# Altium PCB PCB_micromouseV4_2025-09-20.pcbdoc
Units mm, origin at the board's own origin, x right, y up, seen from the top; angles counter-clockwise.
Board outline 102.76 x 99.65 mm, 2 copper layers (Top Layer, Bottom Layer); 56 components, 43 nets, 243 pads, 0 vias.
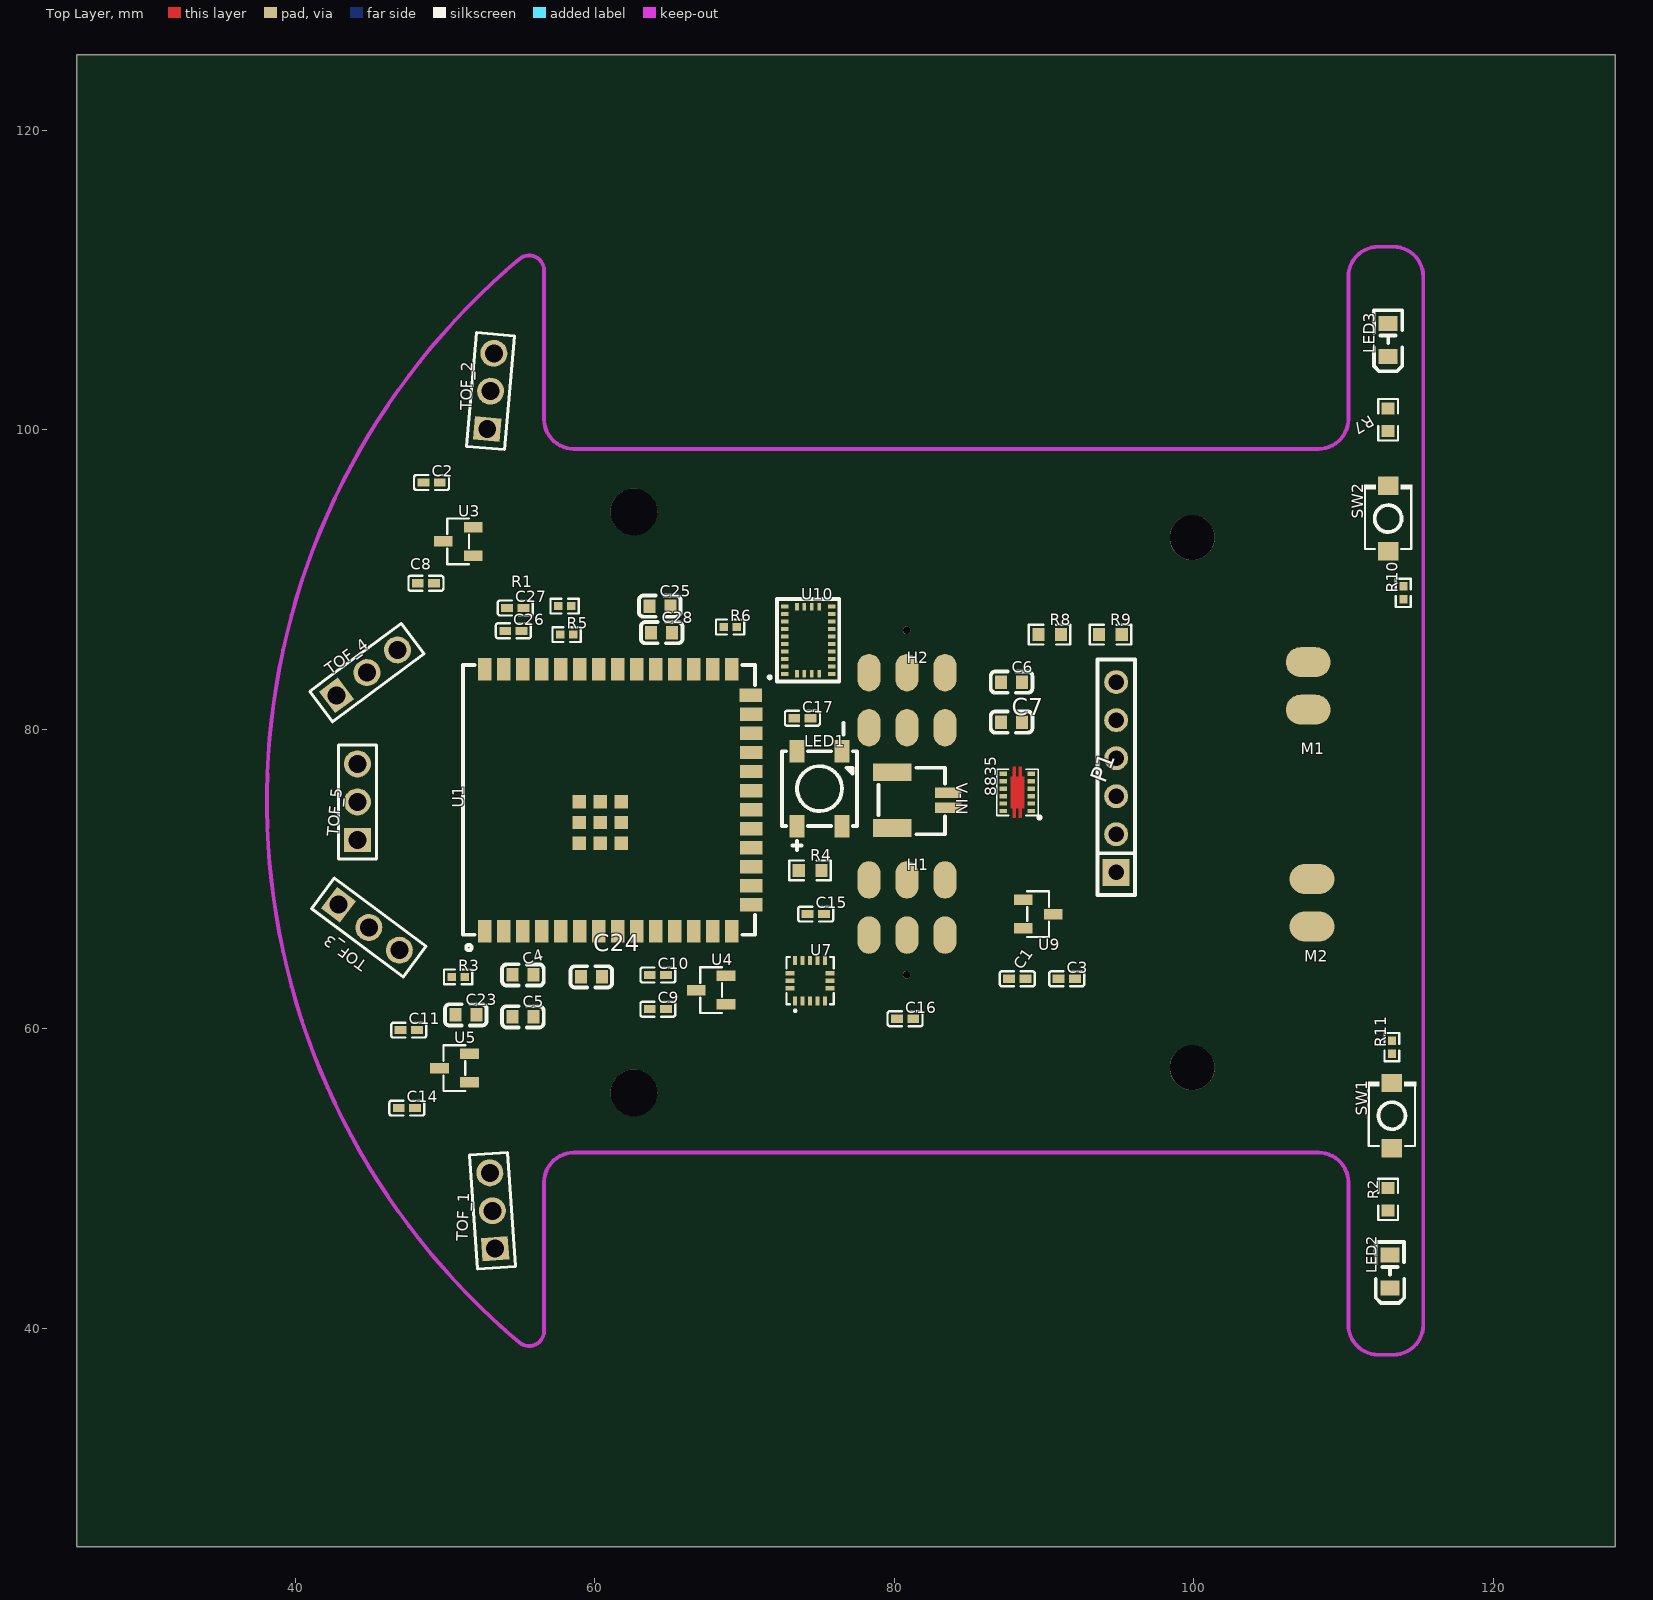
[diagram p0: Top Layer view]
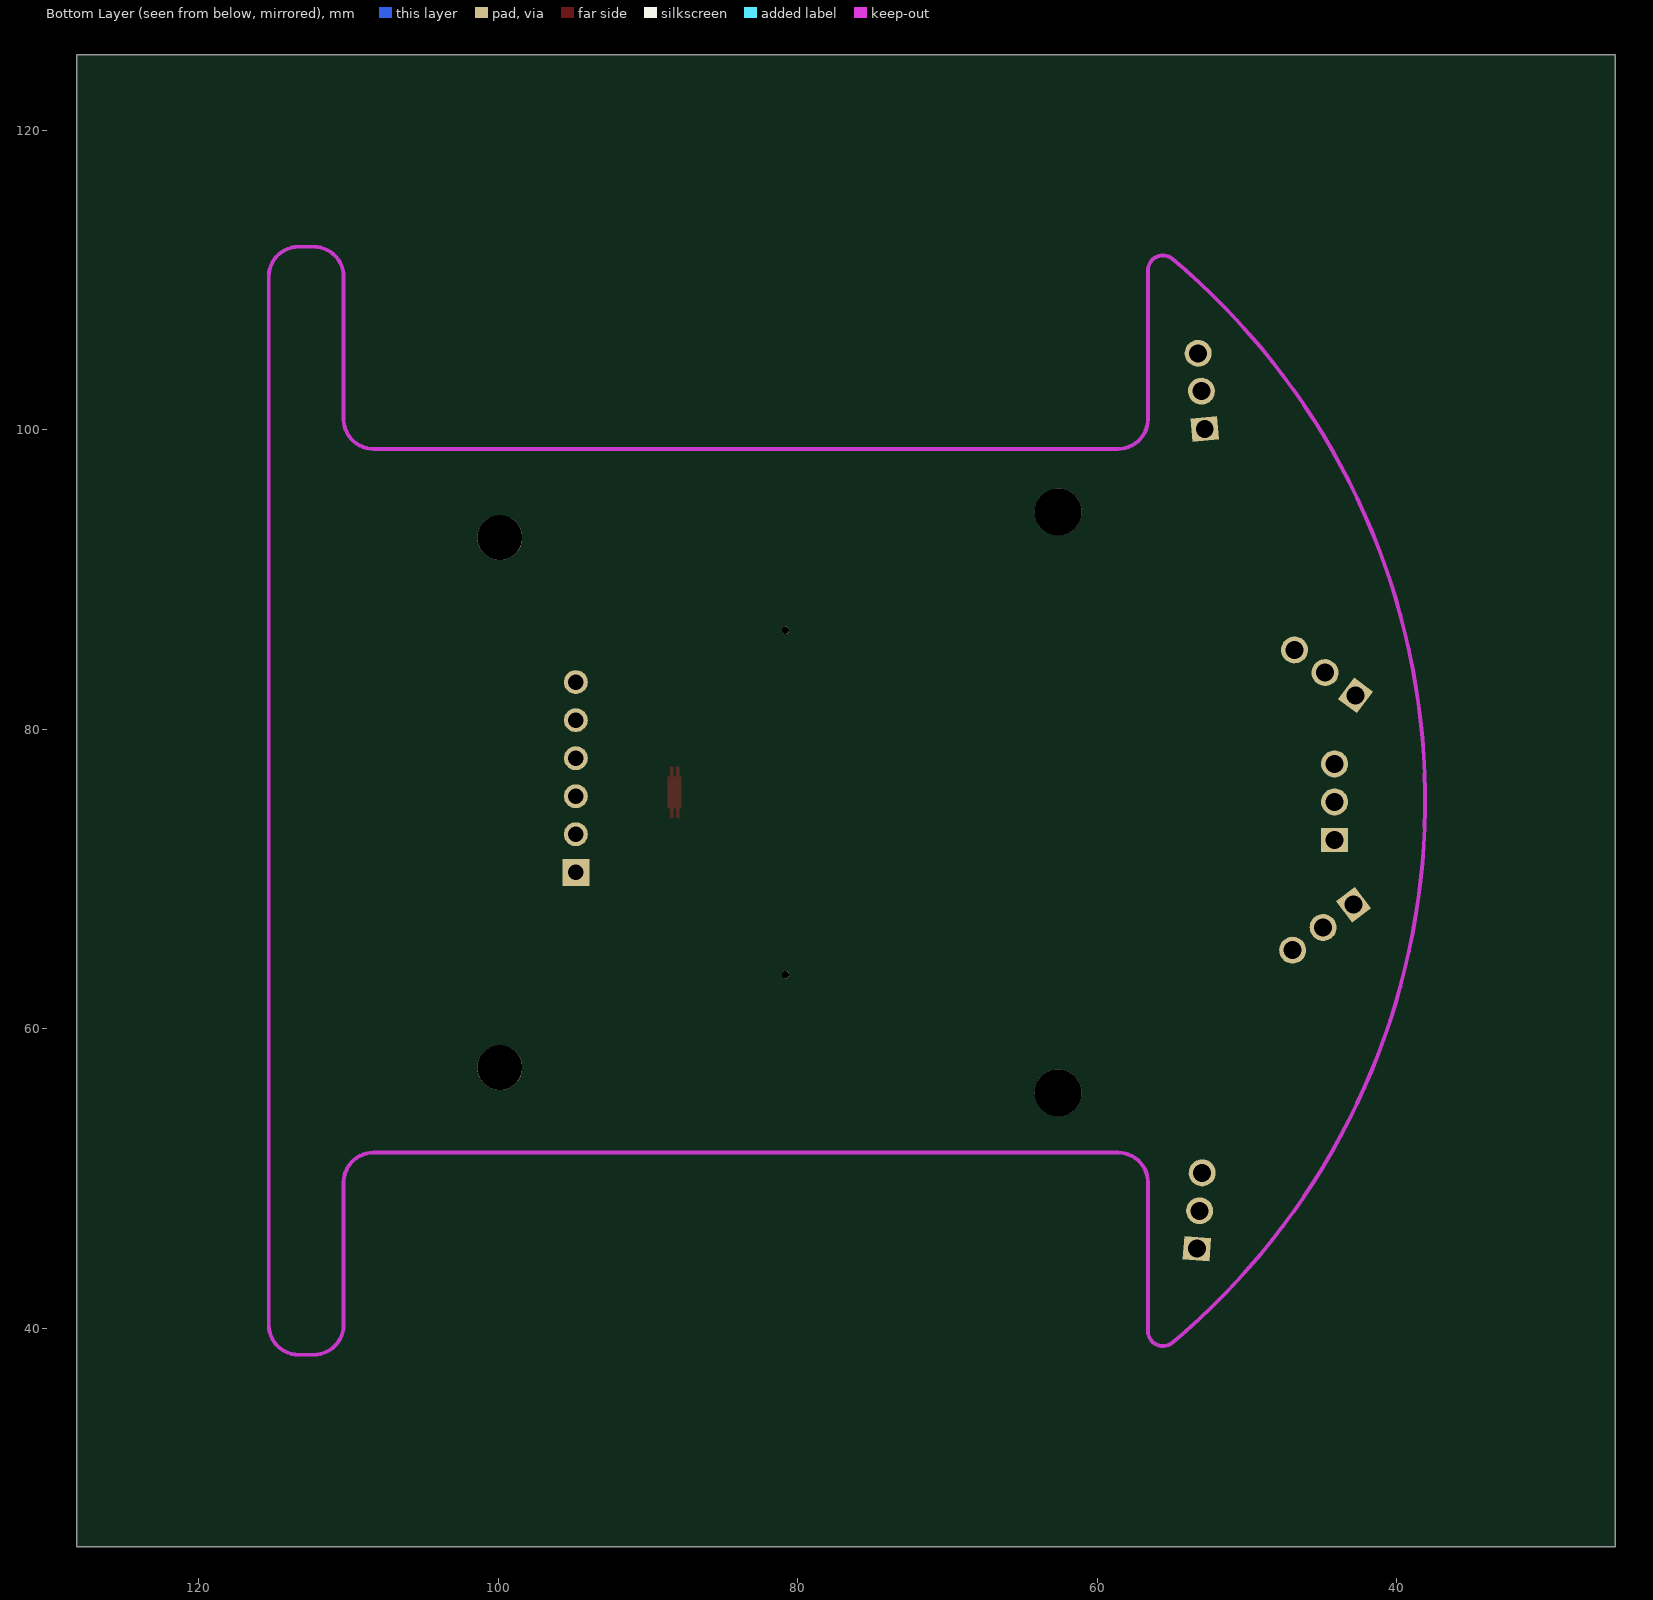
[diagram p1: Bottom Layer view, seen from below]

## Layer stack, top to bottom
Top Layer: signal copper (thickness not stored)
Dielectric: dielectric 0.32, FR-4, Dk 4.8
Bottom Layer: signal copper (thickness not stored)

## Board outline
128.161,25.4 25.4,25.4 25.4,125.054 128.161,125.054

## Components (designator, comment, footprint, x,y, rotation, side; value= is the part's Value field where it differs from the comment)
8835 "DRV8835DSSR" WSON-12_L3.0-W2.0-P0.50-BL-EP 88.22,75.782 r90 top
C1 "1uF" C0402 88.22,63.336 r0 top
C2 "1uF" C0402 49.104,96.483 r0 top
C3 "1uF" C0402 91.522,63.336 r0 top
C4 "100nF" C0603 55.2,63.59 r0 top
C5 "10uF" C0603 55.2,60.796 r0 top
C6 "100nF" C0603 87.839,83.148 r0 top
C7 "100nF" C0603 87.839,80.481 r0 top
C8 "1uF" C0402 48.723,89.752 r0 top
C9 "1uF" C0402 64.217,61.304 r0 top
C10 "1uF" C0402 64.217,63.59 r0 top
C11 "1uF" C0402 47.58,59.907 r0 top
C14 "1uF" C0402 47.453,54.7 r0 top
C15 "100nF" C0402 74.758,67.654 r0 top
C16 "100nF" C0402 80.727,60.669 r0 top
C17 "100nF" C0402 73.869,80.735 r0 top
C23 "100nF" C0603 51.39,60.923 r0 top
C24 "22uF" C0603 59.772,63.463 r0 top
C25 "22nF" C0603 64.344,88.228 r0 top
C26 "100nF" C0402 54.565,86.577 r0 top
C27 "100nF" C0402 54.692,88.101 r0 top
C28 "6.8nF" C0603 64.471,86.45 r0 top
H1 "Header-Male-2.54_1x6" ENCX6 78.314,69.94 r0 top
H2 "Header-Male-2.54_1x6" ENCX6 78.314,83.783 r0 top
LED1 "XL-5050RGBC-WS2812B" LED-SMD_4P-L5.0-W5.0-BL_XL-5050RGBC 75.012,76.036 r0 top
LED2 "XL-2012SURC" LED0805-RD_RED 113.112,43.778 r90 top
LED3 "XL-2012SURC" LED0805-RD_RED 112.985,106.008 r90 top
M1 "M1" M_PADS 107.651,82.894 r180 top
M2 "Header-Male-2.54_1x2" M_PADS 107.905,68.416 r180 top
P1 "Code_Uplaoder" HDR-TH_6P-P2.54-V-F 94.824,76.798 r90 top
R1 "10kΩ" R0402 57.994,88.228 r0 top
R2 "330Ω" R0603 112.985,48.604 r90 top
R3 "10kΩ" R0402 50.882,63.463 r0 top
R4 "330Ω" R0603 74.377,70.575 r0 top
R5 "10kΩ" R0402 58.121,86.323 r0 top
R6 "10kΩ" R0402 69.043,86.831 r0 top
R7 "330Ω" R0603 112.985,100.674 r90 top
R8 "47kΩ" R0603 90.379,86.323 r0 top
R9 "47kΩ" R0603 94.443,86.323 r0 top
R10 "10kΩ" R0402 114.001,89.117 r90 top
R11 "10kΩ" R0402 113.239,58.764 r90 top
SW1 "TS-1088-AR02016" SW-SMD_L3.9-W3.0-P4.45 113.239,54.192 r90 top
SW2 "TS-1088-AR02016" SW-SMD_L3.9-W3.0-P4.45 112.985,94.07 r90 top
TOF_1 "Header-Male-2.54_1x3" HDR-TH_3P-P2.54-V-M-1#1 53.168,47.842 r94 top
TOF_2 "Header-Male-2.54_1x3" HDR-TH_3P-P2.54-V-M-1#1 53.041,102.579 r85 top
TOF_3 "Header-Male-2.54_1x3" HDR-TH_3P-P2.54-V-M-1#1 44.913,66.765 r323.29 top
TOF_4 "Header-Male-2.54_1x3" HDR-TH_3P-P2.54-V-M-1#2 44.786,83.783 r36.71 top
TOF_5 "Header-Male-2.54_1x3" HDR-TH_3P-P2.54-V-M-1#1 44.151,75.147 r90 top
U1 "ESP32-S3-WROOM-1U-N16R2" WIRELM-SMD_ESP32-S3-WROOM-1U 61.55,75.274 r90 top
U3 "AP7333-33SRG-7" SOT-23-3_L2.9-W1.3-P1.90-LS2.4-BR 50.882,92.546 r0 top
U4 "AP7333-33SRG-7" SOT-23-3_L2.9-W1.3-P1.90-LS2.4-BR 67.773,62.574 r0 top
U5 "AP7333-33SRG-7" SOT-23-3_L2.9-W1.3-P1.90-LS2.4-BR 50.628,57.367 r0 top
U7 "ICM-20602" LGA-16_L3.0-W3.0-P0.50-BL 74.377,63.209 r0 top
U9 "AP7333-33SRG-7" SOT-23-3_L2.9-W1.3-P1.90-LS2.4-BR 89.617,67.654 r180 top
U10 "BNO055" LGA-28_L5.2-W3.8-P0.50-BL 74.25,85.942 r0 top
V-IN "1.0-2PWT" CONN-SMD_HC-1.0-2PWT 81.743,75.274 r270 top

## Footprints (in the part's own frame and the unit in brackets; to place one, negate y for a bottom-side part, rotate by r counter-clockwise, add the part's x,y. Pads: shape width x height; smd on the part's side, far side on the other; paste and mask are expansions set on the pad)
C0402 [mm]
  rect 0.79x0.54 smd paste-100 mask+0.051: 1(-0.545,0) 2(0.545,0)
  silkscreen extent -1.17,-0.5 1.17,0.5
C0603 [mm]
  rect 0.8x0.9 smd paste+0 mask+0.051: 1(-0.7,0) 2(0.7,0)
  silkscreen extent -1.39,-0.71 1.39,0.71
CONN-SMD_HC-1.0-2PWT [mm]
  rect 0.7x1.75 smd paste+0 mask+0.051: 1(0.5,1.87) 2(-0.5,1.87)
  rect 1.2x2.55 smd paste+0 mask+0.051: 3(-1.855,-1.87) 4(1.855,-1.87)
  silkscreen extent -2.16,-2.79 2.29,1.65
ENCX6 [mil]
  oval 60x98.42 smd paste+0 mask+2: 1(0,0) 2(100,0) 3(200,0) 4(0,-145) 5(100,-145) 6(200,-145)
HDR-TH_3P-P2.54-V-M-1#1 [mm]
  rect 1.575x1.8 hole 1.2 paste+0 mask+0.051: 1(-2.54,0)
  round 1.8 hole 1.2 paste+0 mask+0.051: 2(0,0) 3(2.54,0)
  silkscreen extent -3.81,-1.27 3.81,1.27
HDR-TH_3P-P2.54-V-M-1#2 [mm]
  rect 1.575x1.8 hole 1.2 rot 179.99 paste+0 mask+0.051: 1(-2.54,0)
  round 1.8 hole 1.2 paste+0 mask+0.051: 2(0,0) 3(2.54,0)
  silkscreen extent -3.81,-1.27 3.81,1.27
HDR-TH_6P-P2.54-V-F [mm]
  rect 1.8x1.8 hole 1.02 paste+0 mask+0.051: 1(-6.35,0)
  round 1.6 hole 1.02 paste+0 mask+0.051: 2(-3.81,0) 3(-1.27,0) 4(1.27,0) 5(3.81,0) 6(6.35,0)
  silkscreen extent -7.87,-1.25 7.87,1.25
LED0805-RD_RED [mm]
  rect 1x1.25 smd paste+0 mask+0.051: 1(-1.1,0) 2(1.1,0)
  silkscreen extent -2.1,-0.95 1.98,0.96
LED-SMD_4P-L5.0-W5.0-BL_XL-5050RGBC [mm]
  rect 1x1.5 smd paste+0 mask+0.051: 1(-1.5,-2.5) 2(1.5,-2.5) 3(1.5,2.5) 4(-1.5,2.5)
  silkscreen extent -2.5,-4.1 2.5,4.4
LGA-16_L3.0-W3.0-P0.50-BL [mm]
  rect 0.28x0.6 smd paste+0 mask+0.051: 1(-1,-1.342) 2(-0.5,-1.342) 3(0,-1.342) 4(0.5,-1.342) 5(1,-1.342) 9(1,1.342) 10(0.5,1.342) 11(0,1.342) 12(-0.5,1.342) 13(-1,1.342)
  rect 0.6x0.28 smd paste+0 mask+0.051: 6(1.342,-0.5) 7(1.342,0) 8(1.342,0.5) 14(-1.342,0.5) 15(-1.342,0) 16(-1.342,-0.5)
  silkscreen extent -1.58,-2.08 1.58,1.58
LGA-28_L5.2-W3.8-P0.50-BL [mm]
  rect 0.5x0.25 smd paste+0 mask+0.051: 1(-1.563,-2.25) 6(1.563,-2.25) 7(1.563,-1.75) 8(1.563,-1.25) 9(1.563,-0.75) 10(1.563,-0.25) 11(1.563,0.25) 12(1.563,0.75) 13(1.563,1.25) 14(1.563,1.75) 15(1.563,2.25) 20(-1.563,2.25) 21(-1.563,1.75) 22(-1.563,1.25) 23(-1.563,0.75) 24(-1.563,0.25) 25(-1.563,-0.25) 26(-1.563,-0.75) 27(-1.563,-1.25) 28(-1.563,-1.75)
  rect 0.25x0.5 smd paste+0 mask+0.051: 2(-0.75,-2.25) 3(-0.25,-2.25) 4(0.25,-2.25) 5(0.75,-2.25) 16(0.75,2.25) 17(0.25,2.25) 18(-0.25,2.25) 19(-0.75,2.25)
  silkscreen extent -2.66,-2.75 2.08,2.75
M_PADS [mm]
  oval 3x2 smd paste+0 mask+0.051: 1(0,1.587) 2(0,-1.587)
R0402 [mm]
  rect 0.566x0.54 smd paste-100 mask+0.051: 1(-0.433,0) 2(0.433,0)
  silkscreen extent -0.94,-0.5 0.94,0.5
R0603 [mm]
  rect 0.806x0.864 smd paste-100 mask+0.051: 1(-0.753,0) 2(0.753,0)
  silkscreen extent -1.39,-0.66 1.39,0.66
SOT-23-3_L2.9-W1.3-P1.90-LS2.4-BR [mm]
  rect 1.25x0.7 smd paste+0 mask+0.051: 1(1,-0.95) 2(1,0.95) 3(-1,0)
  silkscreen extent -0.73,-1.53 0.73,1.53
SW-SMD_L3.9-W3.0-P4.45 [mm]
  rect 1.23x1.36 smd paste+0 mask+0.051: 1(-2.185,0) 2(2.185,0)
  silkscreen extent -2.03,-1.62 2.25,1.62
WIRELM-SMD_ESP32-S3-WROOM-1U [mm]
  rect 1.5x0.9 smd paste+0 mask+0.05: 1(-8.75,8.895) 2(-8.75,7.625) 3(-8.75,6.355) 4(-8.75,5.085) 5(-8.75,3.815) 6(-8.75,2.545) 7(-8.75,1.275) 8(-8.75,0.005) 9(-8.75,-1.265) 10(-8.75,-2.535) 11(-8.75,-3.805) 12(-8.75,-5.075) 13(-8.75,-6.345) 14(-8.75,-7.615) 27(8.75,-7.615) 28(8.75,-6.345) 29(8.75,-5.075) 30(8.75,-3.805) 31(8.75,-2.535) 32(8.75,-1.265) 33(8.75,0.005) 34(8.75,1.275) 35(8.75,2.545) 36(8.75,3.815) 37(8.75,5.085) 38(8.75,6.355) 39(8.75,7.625) 40(8.75,8.895)
  rect 0.9x1.5 smd paste+0 mask+0.05: 15(-6.985,-8.895) 16(-5.715,-8.895) 17(-4.445,-8.895) 18(-3.175,-8.895) 19(-1.905,-8.895) 20(-0.635,-8.895) 21(0.635,-8.895) 22(1.905,-8.895) 23(3.175,-8.895) 24(4.445,-8.895) 25(5.715,-8.895) 26(6.985,-8.865)
  rect 0.9x0.9 smd paste+0 mask+0.051: 41(-2.9,-0.225) 41(-2.9,1.175) 41(-2.9,2.575) 41(-1.501,2.575) 41(-1.501,-0.225) 41(-1.501,1.175) 41(-0.1,2.575) 41(-0.1,1.175) 41(-0.1,-0.225)
  silkscreen extent -10.04,-9.14 9.02,10.36
WSON-12_L3.0-W2.0-P0.50-BL-EP [mil]
  rect 11x19.7 smd paste+0 mask+2: 1(-49.21,-37) 2(-29.53,-37) 3(-9.84,-37) 4(9.84,-37) 5(29.53,-37) 6(49.21,-37) 7(49.21,37) 8(29.53,37) 9(9.84,37) 10(-9.84,37) 11(-29.53,37) 12(-49.21,37)
  Top Layer region: -41.34,17.72 -41.34,11.81 -66.93,11.81 -66.93,3.94 -66.93,3.94 -41.34,3.94 -41.34,-3.94 -66.93,-3.94 -66.93,-11.81 -41.34,-11.81 -41.34,-17.72 41.34,-17.72 41.34,-11.81 66.93,-11.81 66.93,-3.94 41.34,-3.94 41.34,3.94 66.93,3.94 66.93,11.81 41.34,11.81 41.34,17.72
  silkscreen extent -69,-61 61,54

## Free pads (board coordinates)
  round 3.124 hole 3.124 unplated paste+0: ""(62.614,55.716) ""(62.614,94.516)
  round 3 hole 3 unplated paste+0: ""(62.614,55.7) ""(99.904,57.4) ""(99.904,92.8)
  round 0.5 hole 0.5 unplated paste+0: ""(80.824,63.6) ""(80.824,63.616) ""(80.824,86.6) ""(80.824,86.616)

## Nets (pads, with @x,y where several pads share a name; then routed paths per layer and width w, separated by ;. In a path a pad name is that pad's centre, name@x,y a point inside that pad or via, vN(x,y) a via of type N, cw(c..) or ccw(c..) an arc to the next point about the centre after c; other vN are vias at no path point)
3V3: 8835.12 C7.2
3V3_ENC: C1.2 H1.2 H2.2 U9.2
3V3_ESP: C4.2 C5.2 C8.2 C24.2 LED1.1 P1.6 R3.2 SW1.2 SW2.2 U1.2 U3.2
3V3_GYRO: C10.2 C16.2 C17.2 C25.2 C27.1 C28.2 R1.1 R5.2 R6.2 U4.2 U7.1 U7.16 U10.3 U10.28
3V3_TOF: C14.2 TOF_1.2 TOF_2.2 TOF_3.2 TOF_4.2 TOF_5.2 U5.2
BATTERY: 8835.1 C2.2 C3.2 C6.2 C9.2 C11.2 R9.2 U3.3 U4.3 U5.3 U9.3 V-IN.1
C15_2: C15.2 U7.14
C26_1: C26.1 U10.9
CS: H1.6 H2.6 U1.24
EN: C23.2 P1.2 R3.1 U1.3
GND: 8835.6 8835.11 C1.1 C2.1 C3.1 C4.1 C5.1 C6.1 C7.1 C8.1 C9.1 C10.1 C11.1 C14.1 C15.1 C16.1 C17.1 C23.1 C24.1 C25.1 C26.2 C27.2 C28.1 H1.1 H2.1 LED1.3 P1.5 R2.2 R7.2 R8.1 R10.1 R11.1 TOF_1.3 TOF_2.3 TOF_3.3 TOF_4.3 TOF_5.3 U1.1 U1.40 U1.41 U3.1 U4.1 U5.1 U7.8 U7.9 U7.10 U7.11 U7.12 U7.13 U7.15 U9.1 U10.2 U10.5 U10.6 U10.15 U10.16 U10.18 U10.25 V-IN.2
GPIO_0: P1.1 U1.27
LED: R4.1 U1.11 U1.25
LED1_4: LED1.4 R4.2
LED2_1: LED2.1 R7.1
LED3_1: LED3.1 R2.1
LED_L: LED2.2 U1.33
LED_R: LED3.2 U1.34
M1_1: 8835.2 M2.1
M1_2: 8835.3 M2.2
M1_PHASE: 8835.10 U1.21
M1_PWM: 8835.9 U1.22
M2_1: 8835.4 M1.1
M2_2: 8835.5 M1.2
M2_PHASE: 8835.8 U1.23
M2_PWM: 8835.7 U1.14
MISO_1: H1.4 U1.10
MISO_2: H2.4 U1.30
MOSI: H1.3 H2.3 U1.28
RX: P1.3 U1.36
S1: R10.2 SW2.1 U1.19
S2: R11.2 SW1.1 U1.20
SCL: R5.1 U1.17 U7.2 U10.19
SCLK: H1.5 H2.5 U1.29
SDA: R6.1 U1.12 U7.3 U10.20
TOF_1: TOF_1.1 U1.4
TOF_2: TOF_2.1 U1.5
TOF_3: TOF_3.1 U1.6
TOF_4: TOF_4.1 U1.7
TOF_5: TOF_5.1 U1.8
TX: P1.4 U1.37
U10_4: R1.2 U10.4
V_CHECK: R8.2 R9.1 U1.18
pads on no net: LED1.2 U1.9 U1.13 U1.15 U1.16 U1.26 U1.31 U1.32 U1.35 U1.38 U1.39 U7.4 U7.5 U7.6 U7.7 U10.1 U10.7 U10.8 U10.10 U10.11 U10.12 U10.13 U10.14 U10.17 U10.21 U10.22 U10.23 U10.24 U10.26 U10.27 V-IN.3 V-IN.4

## Polygon pours and split planes (outlines as drawn)
GND on Internal Plane 2 (split plane): 779 vertices, not listed, extent 38.1,38.227 115.334,112.227
GND on Internal Plane 2 (split plane): 95 vertices, not listed, extent 112.993,43.319 113.912,44.237
GND on Internal Plane 2 (split plane): 121 vertices, not listed, extent 52.241,44.308 54.45,46.308
GND on Internal Plane 2 (split plane): 144 vertices, not listed, extent 52.114,46.787 54.223,48.896
GND on Internal Plane 2 (split plane): 19 vertices, not listed, extent 52.071,49.393 52.609,49.895
GND on Internal Plane 2 (split plane): 20 vertices, not listed, extent 53.471,49.456 53.973,49.993
GND on Internal Plane 2 (split plane): 95 vertices, not listed, extent 111.93,49.847 112.849,50.765
GND on Internal Plane 2 (split plane): 20 vertices, not listed, extent 52.008,50.758 52.511,51.296
GND on Internal Plane 2 (split plane): 20 vertices, not listed, extent 53.373,50.856 53.911,51.358
GND on Internal Plane 2 (split plane): 183 vertices, not listed, extent 60.898,53.999 64.331,57.432
GND on Internal Plane 2 (split plane): 180 vertices, not listed, extent 98.25,55.746 101.559,59.054
GND on Internal Plane 2 (split plane): 95 vertices, not listed, extent 106.356,56.141 107.275,57.059
GND on Internal Plane 2 (split plane): 95 vertices, not listed, extent 48.614,57.872 49.533,58.791
GND on Internal Plane 2 (split plane): 95 vertices, not listed, extent 64.175,61.604 65.094,62.522
GND on Internal Plane 2 (split plane): 95 vertices, not listed, extent 73.839,62.576 74.758,63.495
GND on Internal Plane 2 (split plane): 95 vertices, not listed, extent 65.984,63.131 66.903,64.049
GND on Internal Plane 2 (split plane): 93 vertices, not listed, extent 80.42,63.195 81.229,64.02
GND on Internal Plane 2 (split plane): 20 vertices, not listed, extent 46.741,64.192 47.445,64.617
GND on Internal Plane 2 (split plane): 20 vertices, not listed, extent 45.895,64.751 46.32,65.456
GND on Internal Plane 2 (split plane): 95 vertices, not listed, extent 61.756,64.851 62.675,65.77
GND on Internal Plane 2 (split plane): 20 vertices, not listed, extent 47.579,65.038 48.004,65.743
GND on Internal Plane 2 (split plane): 144 vertices, not listed, extent 43.859,65.71 45.968,67.819
GND on Internal Plane 2 (split plane): 19 vertices, not listed, extent 46.454,65.877 47.159,66.301
GND on Internal Plane 2 (split plane): 95 vertices, not listed, extent 79.125,66.075 80.044,66.994
GND on Internal Plane 2 (split plane): 95 vertices, not listed, extent 76.38,66.075 77.299,66.994
GND on Internal Plane 2 (split plane): 95 vertices, not listed, extent 48.673,66.689 49.592,67.607
GND on Internal Plane 2 (split plane): 121 vertices, not listed, extent 41.556,66.939 44.198,69.627
GND on Internal Plane 2 (split plane): 95 vertices, not listed, extent 89.024,67.081 89.944,67.999
GND on Internal Plane 2 (split plane): 95 vertices, not listed, extent 55.426,67.301 56.345,68.22
GND on Internal Plane 2 (split plane): 95 vertices, not listed, extent 63.987,67.788 64.907,68.707
GND on Internal Plane 2 (split plane): 95 vertices, not listed, extent 82.105,67.794 83.024,68.713
GND on Internal Plane 2 (split plane): 121 vertices, not listed, extent 93.772,69.396 95.876,71.5
GND on Internal Plane 2 (split plane): 95 vertices, not listed, extent 67.092,69.404 68.011,70.323
GND on Internal Plane 2 (split plane): 95 vertices, not listed, extent 81.665,70.355 82.584,71.273
GND on Internal Plane 2 (split plane): 121 vertices, not listed, extent 43.099,71.667 45.203,73.546
GND on Internal Plane 2 (split plane): 137 vertices, not listed, extent 93.87,72.033 95.779,73.942
GND on Internal Plane 2 (split plane): 95 vertices, not listed, extent 87.879,72.954 88.798,73.872
GND on Internal Plane 2 (split plane): 95 vertices, not listed, extent 71.273,73.373 72.192,74.292
GND on Internal Plane 2 (split plane): 95 vertices, not listed, extent 86.821,73.463 87.74,74.381
GND on Internal Plane 2 (split plane): 144 vertices, not listed, extent 43.097,74.092 45.206,76.201
GND on Internal Plane 2 (split plane): 95 vertices, not listed, extent 73.413,74.297 74.332,75.216
GND on Internal Plane 2 (split plane): 137 vertices, not listed, extent 93.87,74.573 95.779,76.482
GND on Internal Plane 2 (split plane): 95 vertices, not listed, extent 85.247,75.107 86.167,76.025
GND on Internal Plane 2 (split plane): 95 vertices, not listed, extent 72.033,75.135 72.952,76.054
GND on Internal Plane 2 (split plane): 20 vertices, not listed, extent 43.198,76.733 43.701,77.237
GND on Internal Plane 2 (split plane): 19 vertices, not listed, extent 44.601,76.733 45.105,77.237
GND on Internal Plane 2 (split plane): 137 vertices, not listed, extent 93.87,77.113 95.779,79.022
GND on Internal Plane 2 (split plane): 19 vertices, not listed, extent 44.601,78.137 45.105,78.64
GND on Internal Plane 2 (split plane): 20 vertices, not listed, extent 43.198,78.137 43.701,78.64
GND on Internal Plane 2 (split plane): 95 vertices, not listed, extent 88.383,78.474 89.302,79.393
GND on Internal Plane 2 (split plane): 95 vertices, not listed, extent 86.197,78.643 87.116,79.561
GND on Internal Plane 2 (split plane): 19 vertices, not listed, extent 95.224,79.741 95.691,80.208
GND on Internal Plane 2 (split plane): 19 vertices, not listed, extent 93.958,79.741 94.424,80.208
GND on Internal Plane 2 (split plane): 95 vertices, not listed, extent 79.125,80.414 80.044,81.332
GND on Internal Plane 2 (split plane): 95 vertices, not listed, extent 84.529,80.815 85.449,81.734
GND on Internal Plane 2 (split plane): 95 vertices, not listed, extent 68.391,80.864 69.31,81.783
GND on Internal Plane 2 (split plane): 121 vertices, not listed, extent 41.429,80.921 44.071,83.609
GND on Internal Plane 2 (split plane): 95 vertices, not listed, extent 66.882,80.977 67.801,81.896
GND on Internal Plane 2 (split plane): 19 vertices, not listed, extent 95.224,81.008 95.691,81.474
GND on Internal Plane 2 (split plane): 19 vertices, not listed, extent 93.958,81.008 94.424,81.474
GND on Internal Plane 2 (split plane): 95 vertices, not listed, extent 74.39,81.96 75.309,82.879
GND on Internal Plane 2 (split plane): 137 vertices, not listed, extent 93.87,82.193 95.779,84.102
GND on Internal Plane 2 (split plane): 144 vertices, not listed, extent 43.732,82.728 45.841,84.837
GND on Internal Plane 2 (split plane): 95 vertices, not listed, extent 81.665,82.983 82.584,83.901
GND on Internal Plane 2 (split plane): 95 vertices, not listed, extent 89.677,83.156 90.596,84.074
GND on Internal Plane 2 (split plane): 95 vertices, not listed, extent 93.325,83.678 94.244,84.597
GND on Internal Plane 2 (split plane): 19 vertices, not listed, extent 46.327,84.246 47.032,84.671
GND on Internal Plane 2 (split plane): 95 vertices, not listed, extent 84.265,84.286 85.184,85.204
GND on Internal Plane 2 (split plane): 20 vertices, not listed, extent 47.452,84.805 47.877,85.51
GND on Internal Plane 2 (split plane): 95 vertices, not listed, extent 61.212,84.943 62.132,85.862
GND on Internal Plane 2 (split plane): 20 vertices, not listed, extent 45.768,85.092 46.193,85.796
GND on Internal Plane 2 (split plane): 95 vertices, not listed, extent 74.352,85.377 75.271,86.296
GND on Internal Plane 2 (split plane): 95 vertices, not listed, extent 55.516,85.619 56.435,86.538
GND on Internal Plane 2 (split plane): 95 vertices, not listed, extent 50.876,85.804 51.795,86.723
GND on Internal Plane 2 (split plane): 20 vertices, not listed, extent 46.614,85.931 47.318,86.355
GND on Internal Plane 2 (split plane): 93 vertices, not listed, extent 80.42,86.195 81.229,87.02
GND on Internal Plane 2 (split plane): 95 vertices, not listed, extent 60.585,86.317 61.504,87.235
GND on Internal Plane 2 (split plane): 95 vertices, not listed, extent 91.819,86.588 92.739,87.507
GND on Internal Plane 2 (split plane): 95 vertices, not listed, extent 59.105,87.859 60.024,88.777
GND on Internal Plane 2 (split plane): 95 vertices, not listed, extent 53.351,88.573 54.271,89.491
GND on Internal Plane 2 (split plane): 95 vertices, not listed, extent 73.056,88.827 73.975,89.745
GND on Internal Plane 2 (split plane): 95 vertices, not listed, extent 49.67,89.367 50.59,90.286
GND on Internal Plane 2 (split plane): 180 vertices, not listed, extent 98.25,91.145 101.559,94.454
GND on Internal Plane 2 (split plane): 183 vertices, not listed, extent 60.898,92.799 64.331,96.232
GND on Internal Plane 2 (split plane): 95 vertices, not listed, extent 112.993,98.312 113.912,99.23
GND on Internal Plane 2 (split plane): 121 vertices, not listed, extent 51.703,99.034 53.937,101.063
GND on Internal Plane 2 (split plane): 144 vertices, not listed, extent 51.987,101.524 54.096,103.633
GND on Internal Plane 2 (split plane): 95 vertices, not listed, extent 111.93,103.018 112.849,103.937
GND on Internal Plane 2 (split plane): 19 vertices, not listed, extent 53.628,104.12 54.174,104.622
GND on Internal Plane 2 (split plane): 20 vertices, not listed, extent 52.274,104.199 52.775,104.744
GND on Internal Plane 2 (split plane): 19 vertices, not listed, extent 53.75,105.475 54.252,106.02
GND on Internal Plane 2 (split plane): 20 vertices, not listed, extent 52.352,105.597 52.898,106.098
GND on Internal Plane 1 (split plane): 779 vertices, not listed, extent 38.1,38.227 115.334,112.227
GND on Internal Plane 1 (split plane): 95 vertices, not listed, extent 112.993,43.319 113.912,44.237
GND on Internal Plane 1 (split plane): 121 vertices, not listed, extent 52.241,44.308 54.45,46.308
GND on Internal Plane 1 (split plane): 144 vertices, not listed, extent 52.114,46.787 54.223,48.896
GND on Internal Plane 1 (split plane): 19 vertices, not listed, extent 52.071,49.393 52.609,49.895
GND on Internal Plane 1 (split plane): 20 vertices, not listed, extent 53.471,49.456 53.973,49.993
GND on Internal Plane 1 (split plane): 95 vertices, not listed, extent 111.93,49.847 112.849,50.765
GND on Internal Plane 1 (split plane): 20 vertices, not listed, extent 52.008,50.758 52.511,51.296
GND on Internal Plane 1 (split plane): 20 vertices, not listed, extent 53.373,50.856 53.911,51.358
GND on Internal Plane 1 (split plane): 183 vertices, not listed, extent 60.898,53.999 64.331,57.432
GND on Internal Plane 1 (split plane): 180 vertices, not listed, extent 98.25,55.746 101.559,59.054
GND on Internal Plane 1 (split plane): 95 vertices, not listed, extent 106.356,56.141 107.275,57.059
GND on Internal Plane 1 (split plane): 95 vertices, not listed, extent 48.614,57.872 49.533,58.791
GND on Internal Plane 1 (split plane): 95 vertices, not listed, extent 64.175,61.604 65.094,62.522
GND on Internal Plane 1 (split plane): 95 vertices, not listed, extent 73.839,62.576 74.758,63.495
GND on Internal Plane 1 (split plane): 95 vertices, not listed, extent 65.984,63.131 66.903,64.049
GND on Internal Plane 1 (split plane): 93 vertices, not listed, extent 80.42,63.195 81.229,64.02
GND on Internal Plane 1 (split plane): 20 vertices, not listed, extent 46.741,64.192 47.445,64.617
GND on Internal Plane 1 (split plane): 20 vertices, not listed, extent 45.895,64.751 46.32,65.456
GND on Internal Plane 1 (split plane): 95 vertices, not listed, extent 61.756,64.851 62.675,65.77
GND on Internal Plane 1 (split plane): 20 vertices, not listed, extent 47.579,65.038 48.004,65.743
GND on Internal Plane 1 (split plane): 144 vertices, not listed, extent 43.859,65.71 45.968,67.819
GND on Internal Plane 1 (split plane): 19 vertices, not listed, extent 46.454,65.877 47.159,66.301
GND on Internal Plane 1 (split plane): 95 vertices, not listed, extent 79.125,66.075 80.044,66.994
GND on Internal Plane 1 (split plane): 95 vertices, not listed, extent 76.38,66.075 77.299,66.994
GND on Internal Plane 1 (split plane): 95 vertices, not listed, extent 48.673,66.689 49.592,67.607
GND on Internal Plane 1 (split plane): 121 vertices, not listed, extent 41.556,66.939 44.198,69.627
GND on Internal Plane 1 (split plane): 95 vertices, not listed, extent 89.024,67.081 89.944,67.999
GND on Internal Plane 1 (split plane): 95 vertices, not listed, extent 55.426,67.301 56.345,68.22
GND on Internal Plane 1 (split plane): 95 vertices, not listed, extent 63.987,67.788 64.907,68.707
GND on Internal Plane 1 (split plane): 95 vertices, not listed, extent 82.105,67.794 83.024,68.713
GND on Internal Plane 1 (split plane): 121 vertices, not listed, extent 93.772,69.396 95.876,71.5
GND on Internal Plane 1 (split plane): 95 vertices, not listed, extent 67.092,69.404 68.011,70.323
GND on Internal Plane 1 (split plane): 95 vertices, not listed, extent 81.665,70.355 82.584,71.273
GND on Internal Plane 1 (split plane): 121 vertices, not listed, extent 43.099,71.667 45.203,73.546
GND on Internal Plane 1 (split plane): 137 vertices, not listed, extent 93.87,72.033 95.779,73.942
GND on Internal Plane 1 (split plane): 95 vertices, not listed, extent 87.879,72.954 88.798,73.872
GND on Internal Plane 1 (split plane): 95 vertices, not listed, extent 71.273,73.373 72.192,74.292
GND on Internal Plane 1 (split plane): 95 vertices, not listed, extent 86.821,73.463 87.74,74.381
GND on Internal Plane 1 (split plane): 144 vertices, not listed, extent 43.097,74.092 45.206,76.201
GND on Internal Plane 1 (split plane): 95 vertices, not listed, extent 73.413,74.297 74.332,75.216
GND on Internal Plane 1 (split plane): 137 vertices, not listed, extent 93.87,74.573 95.779,76.482
GND on Internal Plane 1 (split plane): 95 vertices, not listed, extent 85.247,75.107 86.167,76.025
GND on Internal Plane 1 (split plane): 95 vertices, not listed, extent 72.033,75.135 72.952,76.054
GND on Internal Plane 1 (split plane): 20 vertices, not listed, extent 43.198,76.733 43.701,77.237
GND on Internal Plane 1 (split plane): 19 vertices, not listed, extent 44.601,76.733 45.105,77.237
GND on Internal Plane 1 (split plane): 137 vertices, not listed, extent 93.87,77.113 95.779,79.022
GND on Internal Plane 1 (split plane): 19 vertices, not listed, extent 44.601,78.137 45.105,78.64
GND on Internal Plane 1 (split plane): 20 vertices, not listed, extent 43.198,78.137 43.701,78.64
GND on Internal Plane 1 (split plane): 95 vertices, not listed, extent 88.383,78.474 89.302,79.393
GND on Internal Plane 1 (split plane): 95 vertices, not listed, extent 86.197,78.643 87.116,79.561
GND on Internal Plane 1 (split plane): 19 vertices, not listed, extent 95.224,79.741 95.691,80.208
GND on Internal Plane 1 (split plane): 19 vertices, not listed, extent 93.958,79.741 94.424,80.208
GND on Internal Plane 1 (split plane): 95 vertices, not listed, extent 79.125,80.414 80.044,81.332
GND on Internal Plane 1 (split plane): 95 vertices, not listed, extent 84.529,80.815 85.449,81.734
GND on Internal Plane 1 (split plane): 95 vertices, not listed, extent 68.391,80.864 69.31,81.783
GND on Internal Plane 1 (split plane): 121 vertices, not listed, extent 41.429,80.921 44.071,83.609
GND on Internal Plane 1 (split plane): 95 vertices, not listed, extent 66.882,80.977 67.801,81.896
GND on Internal Plane 1 (split plane): 19 vertices, not listed, extent 95.224,81.008 95.691,81.474
GND on Internal Plane 1 (split plane): 19 vertices, not listed, extent 93.958,81.008 94.424,81.474
GND on Internal Plane 1 (split plane): 95 vertices, not listed, extent 74.39,81.96 75.309,82.879
GND on Internal Plane 1 (split plane): 137 vertices, not listed, extent 93.87,82.193 95.779,84.102
GND on Internal Plane 1 (split plane): 144 vertices, not listed, extent 43.732,82.728 45.841,84.837
GND on Internal Plane 1 (split plane): 95 vertices, not listed, extent 81.665,82.983 82.584,83.901
GND on Internal Plane 1 (split plane): 95 vertices, not listed, extent 89.677,83.156 90.596,84.074
GND on Internal Plane 1 (split plane): 95 vertices, not listed, extent 93.325,83.678 94.244,84.597
GND on Internal Plane 1 (split plane): 19 vertices, not listed, extent 46.327,84.246 47.032,84.671
GND on Internal Plane 1 (split plane): 95 vertices, not listed, extent 84.265,84.286 85.184,85.204
GND on Internal Plane 1 (split plane): 20 vertices, not listed, extent 47.452,84.805 47.877,85.51
GND on Internal Plane 1 (split plane): 95 vertices, not listed, extent 61.212,84.943 62.132,85.862
GND on Internal Plane 1 (split plane): 20 vertices, not listed, extent 45.768,85.092 46.193,85.796
GND on Internal Plane 1 (split plane): 95 vertices, not listed, extent 74.352,85.377 75.271,86.296
GND on Internal Plane 1 (split plane): 95 vertices, not listed, extent 55.516,85.619 56.435,86.538
GND on Internal Plane 1 (split plane): 95 vertices, not listed, extent 50.876,85.804 51.795,86.723
GND on Internal Plane 1 (split plane): 20 vertices, not listed, extent 46.614,85.931 47.318,86.355
GND on Internal Plane 1 (split plane): 93 vertices, not listed, extent 80.42,86.195 81.229,87.02
GND on Internal Plane 1 (split plane): 95 vertices, not listed, extent 60.585,86.317 61.504,87.235
GND on Internal Plane 1 (split plane): 95 vertices, not listed, extent 91.819,86.588 92.739,87.507
GND on Internal Plane 1 (split plane): 95 vertices, not listed, extent 59.105,87.859 60.024,88.777
GND on Internal Plane 1 (split plane): 95 vertices, not listed, extent 53.351,88.573 54.271,89.491
GND on Internal Plane 1 (split plane): 95 vertices, not listed, extent 73.056,88.827 73.975,89.745
GND on Internal Plane 1 (split plane): 95 vertices, not listed, extent 49.67,89.367 50.59,90.286
GND on Internal Plane 1 (split plane): 180 vertices, not listed, extent 98.25,91.145 101.559,94.454
GND on Internal Plane 1 (split plane): 183 vertices, not listed, extent 60.898,92.799 64.331,96.232
GND on Internal Plane 1 (split plane): 95 vertices, not listed, extent 112.993,98.312 113.912,99.23
GND on Internal Plane 1 (split plane): 121 vertices, not listed, extent 51.703,99.034 53.937,101.063
GND on Internal Plane 1 (split plane): 144 vertices, not listed, extent 51.987,101.524 54.096,103.633
GND on Internal Plane 1 (split plane): 95 vertices, not listed, extent 111.93,103.018 112.849,103.937
GND on Internal Plane 1 (split plane): 19 vertices, not listed, extent 53.628,104.12 54.174,104.622
GND on Internal Plane 1 (split plane): 20 vertices, not listed, extent 52.274,104.199 52.775,104.744
GND on Internal Plane 1 (split plane): 19 vertices, not listed, extent 53.75,105.475 54.252,106.02
GND on Internal Plane 1 (split plane): 20 vertices, not listed, extent 52.352,105.597 52.898,106.098

## Keep-outs
Keep-Out Layer:
  lines w0.254: 56.614,39.81 cw(c55.614,39.81) 54.972,39.044 cw(c85.334,75.227) 54.972,111.41 cw(c55.614,110.644) 56.614,110.644 ; 56.614,49.727 cw(c58.614,49.727) 58.614,51.727 ; 56.614,100.727 ccw(c58.614,100.727) 58.614,98.727 ; 108.334,51.727 cw(c108.334,49.727) 110.334,49.727 ; 108.334,98.727 ccw(c108.334,100.727) 110.334,100.727 ; 110.334,40.227 ccw(c112.334,40.227) 112.334,38.227 ; 110.334,110.227 cw(c112.334,110.227) 112.334,112.227 ; 113.334,38.227 ccw(c113.334,40.227) 115.334,40.227 ; 113.334,112.227 cw(c113.334,110.227) 115.334,110.227